# Allegro board VL53L0X.brd
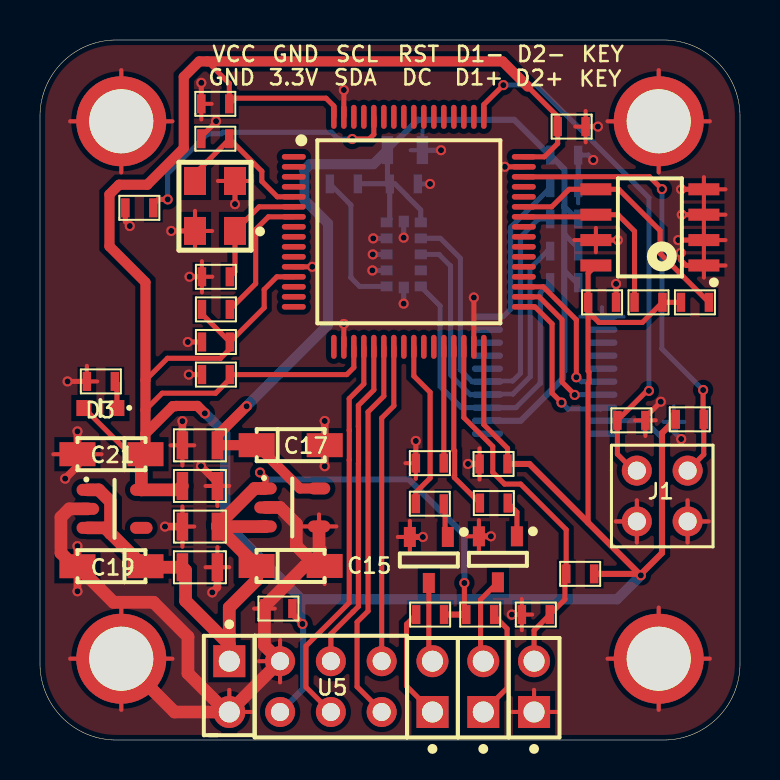
[diagram p0: board, top side]
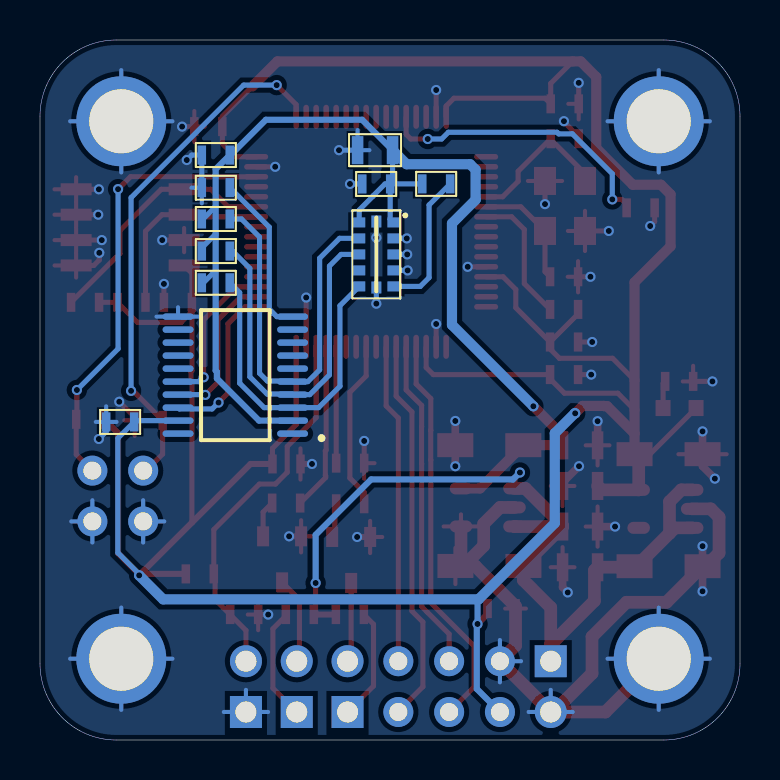
[diagram p1: board, bottom side, seen from below]

Outline 35 x 35 mm; copper layers: TOP, BOTTOM. Coordinates in mm from the lower left corner of the outline.
Outline path: 0,31.19 0,3.81 arc(1.12,1.12) 3.81,0 31.19,0 arc(33.89,1.12) 35,3.81 35,31.19 arc(33.89,33.89) 31.19,35 3.81,35 arc(1.12,33.89) 0,31.19

## Placement (name value [footprint] x y rotation side)
C1  0.1uF  [0603]  8.8 19.9 0 top
C2  0.1uF  [0603]  8.8 18.27 0 top
C3  0.1uF  [0603]  22.68 13.8 0 top
C4  0.1uF  [0603]  8.77 31.81 0 top
C5  0.1uF  [0603]  26.58 30.67 180 top
C6  22pF  [0603]  8.8 23.16 0 top
C7  22pF  [0603]  8.77 30.06 0 top
C8  0.1uF  [0603]  18.19 27.8 180 bottom
C9  4.7uF  [0805]  18.25 29.49 180 bottom
C10  0.1uF  [0603]  28.11 21.88 180 top
C11  0.1uF  [0603]  11.92 6.57 0 top
C12  0.1uF  [0603]  30.99 15.91 180 bottom
C13  0.1uF  [0603]  26.21 29.25 180 bottom
C14  0.1uF  [0603]  24.79 6.27 0 top
C15  10uF  [CAP-3216]  10.83 8.7 0 top
C16  0.1uF  [0805]  8 10.67 0 top
C17  10uF  [CAP-3216]  10.84 14.74 0 top
C18  0.1uF  [0805]  8 14.73 0 top
C19  10uF  [CAP-3216]  5.27 8.69 180 top
C20  0.1uF  [0805]  8 8.64 180 top
C21  10uF  [CAP-3216]  5.27 14.29 180 top
C22  0.1uF  [0805]  8 12.7 180 top
D1  RED  [H-2]  22.16 1.4 90 top
D2  RED  [H-2]  19.62 1.4 90 top
D3  Power  [LED-0603]  3.02 16.6 180 top
J1  Header2*2  [H-2-2]  29.84 13.47 0 top
J2  HEADER2  [H-2]  9.46 3.94 270 top
J3  HEADER2  [H-2]  24.7 1.4 90 top
M1  MTG  [MTG-450-320]  4.06 4.06 0 top
M2  MTG  [MTG-450-320]  30.94 30.94 0 top
M3  MTG  [MTG-450-320]  30.94 4.06 0 top
M4  MTG  [MTG-450-320]  4.06 30.94 0 top
O1  8M  [OSC-3225]  8.75 26.7 180 top
Q1  S9014  [S9014-SOT23]  22.9 9.03 270 top
Q2  S9014  [S9014-SOT23]  19.44 9 270 top
R1  10K  [0603]  19.49 13.84 0 top
R2  10K  [0603]  4.97 26.61 0 top
R3  10K  [0603]  29.57 15.98 0 top
R4  10K  [0603]  32.49 16.04 0 top
R5  10K  [0603]  8.8 21.53 0 top
R6  10K  [0603]  26.21 26.05 0 bottom
R7  10K  [0603]  26.21 24.45 0 bottom
R8  10K  [0603]  26.21 22.86 0 bottom
R9  10K  [0603]  15.19 27.81 0 bottom
R10  0R  [0603]  26.21 27.62 180 bottom
R11  10K  [0603]  30.43 21.88 0 top
R12  10K  [0603]  32.75 21.88 180 top
R13  10K  [0603]  27.01 8.31 0 top
R14  200R  [0603]  19.51 6.27 0 top
R15  200R  [0603]  22.01 6.27 180 top
R16  4.7K  [0603]  22.69 11.85 180 top
R17  4.7K  [0603]  19.49 11.81 180 top
R18  1.5K  [0603]  3.04 17.93 0 top
U1  STM32F103RBT6  [STM32F103_LQFP64]  12.78 29.16 0 top
U2  TXS0108EPWR  [TXS0108EPWR-TSSOP20]  25.24 18.24 0 bottom
U3  -  [VL53L0X]  18.18 24.28 180 bottom
U4  AT24C02  [AT24C02-SOIC]  30.5 25.63 180 top
U5  0.96LCD  [H-3-2]  12 3.94 0 top
U6  TPS78228DDCR  [SOT-25]  12.61 11.63 0 top
U7  XC6219F331  [SOT-25]  3.73 11.56 0 top

## Library data of the parts
C1-C14 C16 C18 C20 C22 = Cap
C15 C17 C19 C21 = Cap+
D1-D3 = LED
J1 = Header2*2
J2 J3 = HEADER 2/SM
M1-M4 = MTG
O1 = OSC-N
Q1 Q2 = S9014
R1-R18 = Res
U1 = STM32F103RBT6
U2 = TXS0108EPWR
U3 = VL53L0X
U4 = AT24C02
U5 = 0.96LCD
U6 = TPS78228DDCR
U7 = XC6219F331

## Footprints (pads in the part's own frame, mm; a bottom-side part is the same pattern mirrored in y, then rotated)
0603
  rect 0.425x0.95 smd: 1(-0.7,0) 2(0.7,0)
0805
  rect 0.575x1.4 smd: 1(-0.875,0) 2(0.875,0)
AT24C02-SOIC
  rect 1.55x0.6 smd: 1(-2.7,1.905) 2(-2.7,0.635) 3(-2.7,-0.635) 4(-2.7,-1.905) 5(2.7,-1.905) 6(2.7,-0.635) 7(2.7,0.635) 8(2.7,1.905)
CAP-3216
  rect 1.8x1.2 smd: 1(0,0) 2(3.4,0)
H-2
  rect 1.6x1.6 hole 1.05: 1(0,0)
  round 1.6 hole 1.05: 2(2.54,0)
H-2-2
  round 1.5 hole 0.9: 1(0,0) 2(2.54,0) 3(0,-2.54) 4(2.54,-2.54)
H-3-2
  round 1.5 hole 0.9: 1(0,0) 2(0,-2.54) 3(2.54,0) 4(2.54,-2.54) 5(5.08,0) 6(5.08,-2.54)
LED-0603
  rect 0.75x0.8 smd: 1(0.825,0) 2(-0.825,0)
MTG-450-320
  round 4.5 hole 3.2: 1(0,0)
OSC-3225
  rect 1.1x1.4 smd: 1(-1,1.25) 2(-1,-1.25) 3(1,-1.25) 4(1,1.25)
S9014-SOT23
  rect 1x0.6 smd: 1(-1.15,0.95) 2(-1.15,-0.95) 3(1.15,0)
SOT-25
  oval 1.125x0.6 smd: 1(-1.338,0.95) 2(-1.338,0) 3(-1.338,-0.95) 4(1.338,-0.95) 5(1.338,0.95)
STM32F103_LQFP64
  oval 1.2x0.28 smd: 1(-0.087,0) 2(-0.087,-0.5) 3(-0.087,-1) 4(-0.087,-1.5) 5(-0.087,-2) 6(-0.087,-2.5) 7(-0.087,-3) 8(-0.087,-3.5) 9(-0.087,-4) 10(-0.087,-4.5) 11(-0.087,-5) 12(-0.087,-5.5) 13(-0.087,-6) 14(-0.087,-6.5) 15(-0.087,-7) 16(-0.087,-7.5) 33(11.412,-7.5) 34(11.412,-7) 35(11.412,-6.5) 36(11.412,-6) 37(11.412,-5.5) 38(11.412,-5) 39(11.412,-4.5) 40(11.412,-4) 41(11.412,-3.5) 42(11.412,-3) 43(11.412,-2.5) 44(11.412,-2) 45(11.412,-1.5) 46(11.412,-1) 47(11.412,-0.5) 48(11.412,0)
  oval 0.28x1.2 smd: 17(1.913,-9.5) 18(2.412,-9.5) 19(2.913,-9.5) 20(3.412,-9.5) 21(3.913,-9.5) 22(4.412,-9.5) 23(4.913,-9.5) 24(5.412,-9.5) 25(5.913,-9.5) 26(6.412,-9.5) 27(6.913,-9.5) 28(7.412,-9.5) 29(7.913,-9.5) 30(8.412,-9.5) 31(8.913,-9.5) 32(9.412,-9.5) 49(9.412,2) 50(8.913,2) 51(8.412,2) 52(7.913,2) 53(7.412,2) 54(6.913,2) 55(6.412,2) 56(5.913,2) 57(5.412,2) 58(4.913,2) 59(4.412,2) 60(3.913,2) 61(3.412,2) 62(2.913,2) 63(2.412,2) 64(1.913,2)
TXS0108EPWR-TSSOP20
  oval 1.55x0.325 smd: 1(-2.863,2.925) 2(-2.863,2.275) 3(-2.863,1.625) 4(-2.863,0.975) 5(-2.863,0.325) 6(-2.863,-0.325) 7(-2.863,-0.975) 8(-2.863,-1.625) 9(-2.863,-2.275) 10(-2.863,-2.925) 11(2.863,-2.925) 12(2.863,-2.275) 13(2.863,-1.625) 14(2.863,-0.975) 15(2.863,-0.325) 16(2.863,0.325) 17(2.863,0.975) 18(2.863,1.625) 19(2.863,2.275) 20(2.863,2.925)
VL53L0X
  rect 0.6x0.5 smd: 1(0.855,1.6) 2(0.855,0.8) 3(0.855,0) 4(0.855,-0.8) 5(0.855,-1.6) 7(-0.855,-1.6) 8(-0.855,-0.8) 9(-0.855,0) 10(-0.855,0.8) 11(-0.855,1.6)
  rect 0.5x0.6 smd: 6(0,-1.655) 12(0,1.645)

## Nets
GND: C1.1 C2.1 C3.1 C4.1 C5.1 C6.1 C7.1 C8.1 C9.1 C10.1 C11.1 C12.1 C13.1 C14.1 C15.2 C16.1 C17.2 C18.1 C19.2 C20.1 C21.2 C22.1 J1.3 J1.4 J2.2 J3.1 M1.1 M2.1 M3.1 M4.1 O1.2(GND1) O1.4(GND2) Q1.2(E) Q2.2(E) R1.1 R2.1 R3.2 R10.1 R18.1 U1.12(VSSA) U1.18(VSS4) U1.31(VSS1) U1.47(VSS2) U1.63(VSS3) U2.11(GND) U3.2(AVSSVCSEL) U3.3(GND1) U3.4(GND2) U3.6(GND3) U3.12(GND4) U4.1(A0) U4.2(A1) U4.3(A2) U4.4(GND) U4.7(WP) U5.1(GND) U6.2(VSS) U6.4(GND) U7.2(VSS)
VCC_5V: C15.1 C16.2 C19.1 C20.2 J2.1 R14.2 R15.2 U6.1(VIN) U6.3(CE) U7.1(VIN) U7.3(CE)
VDD2.8: C8.2 C9.2 C13.2 C17.1 C18.2 R6.2 R7.2 R8.2 R9.2 U2.2(VCCA) U3.1(AVDDVCSEL) U3.11(AVDD) U6.5(VOUT)
VDD3.3: C1.2 C2.2 C3.2 C4.2 C5.2 C10.2 C11.2 C12.2 C21.1 C22.2 D3.1 R4.1 R5.1 R11.2 R12.2 R13.2 U1.13(VDDA) U1.19(VDD4) U1.32(VDD1) U1.48(VDD2) U1.64(VDD3) U2.19(VCCB) U4.8(VCC) U5.2(VCC) U7.5(VOUT)
JTCK: J1.1 R3.1 U1.49(PA14(SDCLK))
JTMS: J1.2 R4.2 U1.46(PA13(SWDIO))
NRST: R5.2 U1.7(NRST)
OSC_IN: C7.2 O1.3(X2) U1.5(OSC_IN)
OSC_OUT: C6.2 O1.1(X1) U1.6(OSC_OUT)
N00130: U1.33(PB12) U2.18(B2)
N00134: U1.34(PB13) U2.17(B3)
N00138: U1.35(PB14) U2.16(B4)
N00228: R16.2 U1.29(PB10)
N00232: R17.2 U1.25(PC5)
N00288: C14.2 J3.2 R13.1 U1.30(PB11)
N00397: R11.1 U1.42(PA9) U4.6(SCL)
N00401: R12.1 U1.43(PA10) U4.5(SDA)
N00686: U1.22(PA6) U5.6(D/C)
N00690: U1.23(PA7) U5.5(RST)
N00694: U1.20(PA4) U5.4(SDA)
N00698: U1.21(PA5) U5.3(SCL)
N015161: D3.2 R18.2
N206718: R1.2 U1.28(PB2(BOOT1))
N206722: R2.2 U1.60(BOOT0)
N212005: R9.1 U3.5(XSHUT)
N212009: R8.1 U2.3(A2) U3.7(GPIO1)
N212016: R7.1 U2.4(A3) U3.9(SDA)
N212023: R6.1 U2.5(A4) U3.10(SCL)
N214668: D1.1 R15.1
N214670: D1.2 Q1.3(C)
N1940739: R10.2 U2.10(OE)
N2134190: Q1.1(B) R16.1
N2142270: Q2.1(B) R17.1
N2142271: D2.2 Q2.3(C)
N2142670: D2.1 R14.1

Pads without a net: U1 1 2 3 4 8 9 10 11 14 15 16 17 24 26 27 36 37 38 39 40 41 44 45 50 51 52 53 54 55 56 57 58 59 61 62; U2 1 6 7 8 9 12 13 14 15 20; U3 8; U7 4

## Via types
v1: diameter 0.508, hole 0.305, TOP to BOTTOM, 61 vias

## Routing (per net, layer and track width the routed paths; a pad name or vN(x,y) marks a point on that pad's centre or on a via; arc(x,y) is an arc through that point)
GND: length 258.9
  TOP w0.203: J3.1 24.7,2.51 ; J3.1 25.81,1.4 ; J3.1 23.6,1.4 ; 26.77,30.67 C5.1 ; C5.1 27.28,29.89 ; C5.1 27.28,31.45 ; O1.4 8.61,25.45 ; O1.4 7.75,24.45 ; O1.4 7.75,26.46 ; C20.1 9.46,8.64 ; C20.1 8.87,9.64 ; C20.1 8.28,8.64 ; 8.58,31.81 C4.1 8.07,31.03 ; 2.86,17.93 R18.1 2.34,18.71 ; C16.1 7.71,10.67 ; C16.1 7.12,9.67 ; C16.1 7.12,11.68 ; C22.1 9.46,12.7 ; C22.1 8.87,11.7 ; C22.1 8.28,12.7 ; U4.2 34.28,25 ; U4.2 33.2,25.6 ; U4.2 33.2,24.39 ; M4.1 6.62,30.94 ; M4.1 4.06,28.38 ; M4.1 4.06,33.49 ; M4.1 1.51,30.94 ; 8.89,27.95 O1.2 10.61,27.95 ; C18.1 7.71,14.73 ; C18.1 6.53,14.73 ; C18.1 7.12,13.73 ; M2.1 33.49,30.94 ; M2.1 30.94,33.49 ; M2.1 28.38,30.94 ; M2.1 30.94,28.38 ; U6.4 13.95,11.28 ; U6.4 13.08,10.68 ; U6.4 14.82,10.68 ; M1.1 4.06,6.62 ; M1.1 6.62,4.06 ; M1.1 4.06,1.51 ; M1.1 1.51,4.06 ; 10.95,3.94 U5.1 ; U5.1 12,2.88 ; U5.1 12,5 ; 33.2,25.66 U4.3 ; U4.3 34.28,26.27 ; U4.3 33.2,26.87 ; 9.46,2.51 J2.2 10.57,1.4 ; 14.23,9.61 C15.2 14.23,7.8 ; 32.38,9.87 J1.4 ; J1.4 32.38,11.98 ; J1.4 33.44,10.93 ; Q1.2 21.95,10.99 ; Q1.2 21.95,9.38 ; Q1.2 21.34,10.18 ; 8.1,22.38 C6.1 ; C6.1 8.1,23.94 ; C6.1 8.61,23.16 ; 21.98,13.02 C3.1 21.98,14.58 ; 26.71,25 U4.7 ; U4.7 27.8,24.39 ; U4.7 27.8,25.6 ; 30.94,1.51 M3.1 ; M3.1 30.94,6.62 ; M3.1 28.38,4.06 ; M3.1 33.49,4.06 ; U4.1 34.28,23.73 ; U4.1 33.2,23.12 ; U4.1 33.2,24.33 ; 29.84,9.87 J1.3 ; J1.3 28.79,10.93 ; J1.3 29.84,11.98 ; C14.1 24.09,7.05 ; C14.1 24.09,5.49 ; C14.1 24.61,6.27 ; 17.89,10.15 Q2.2 ; Q2.2 18.49,9.35 ; Q2.2 18.49,10.96 ; 0.67,14.29 C21.2 3.08,14.29 ; 18.27,13.84 R1.1 18.79,13.06 ; 30.27,15.2 R3.2 ; R3.2 29.75,15.98 ; R3.2 30.79,15.98 ; U4.4 34.28,27.54 ; U4.4 33.2,28.14 ; U4.4 33.2,26.93 ; 11.74,6.57 C11.1 10.7,6.57
  TOP w0.254: U4.4 v1(32.06,27.54) ; v1(31.04,16.91) 30.27,16.15 R3.2 ; C5.1 v1(27.9,30.67) ; O1.4 v1(6.56,25.45) ; U4.7 v1(28.89,25) ; U4.2 v1(31.91,25) ; U1.47 v1(23.24,28.66) ; O1.2 v1(9.75,26.8) ; C6.1 v1(7.48,23.16) ; C10.1 v1(28.81,22.81) ; U1.63 v1(15.19,32.5) ; U4.3 v1(32.09,26.27) ; C14.1 v1(23.59,6.27) ; v1(4.49,25.7) 4.27,25.92 R2.1 ; C1.1 v1(7.39,19.9) ; R1.1 v1(18.79,14.95) ; v1(32.04,24.36) 32.04,24 32.31,23.73 U4.1 ; C7.1 8.07,30.17 8.8,30.91 v1(8.8,30.94) ; C4.1 v1(8.07,32.86) ; U1.18 v1(15.19,20.8) ; U1.31 v1(21.69,22.12) ; C2.1 v1(7.44,18.27) ; R18.1 v1(1.38,17.93) ; U1.12 v1(13.61,23.66)
  TOP w0.305: C3.1 v1(21.4,13.8) ; Q1.2 v1(22.55,10.18) ; Q2.2 v1(19.14,10.15)
  TOP w0.381: C20.1 8.87,7.64 v1(8.61,7.38) ; C16.1 v1(6.25,10.67) ; v1(14.24,15.95) C17.2 v1(14.24,13.69) ; v1(1.87,9.69) C19.2 v1(1.87,7.44) ; v1(8.05,13.69) 8.87,12.87 C22.1 ; v1(1.87,15.43) C21.2 1.87,13.68 v1(1.26,13.07) ; C18.1 v1(7.12,15.94)
  TOP w0.635: 9.33,1.4 6.73,1.4 M1.1 ; 9.33,1.4 7.4,3.33 7.4,5.16 5.68,6.89 3.68,6.89 C19.2 1.71,8.69 1.05,9.35 1.05,11.14 1.46,11.56 U7.2 ; 9.33,1.4 J2.2 U5.1 11.22,4.72 C11.1 11.22,6.68 13.24,8.7 C15.2 13.95,8.98 ; U6.2 12,11.63 12.82,10.81 12.82,9.71 13.54,8.98 13.95,8.98 ; 13.95,8.98 U6.4
  BOTTOM w0.203: 26.91,26.84 R10.1 27.43,27.62 ; J3.1 25.81,1.4 ; J3.1 23.6,1.4 ; J3.1 24.7,2.51 ; 18.53,29.49 C9.1 19.12,30.5 ; M1.1 4.06,6.62 ; M1.1 6.62,4.06 ; M1.1 1.51,4.06 ; M1.1 4.06,1.51 ; 28.79,10.93 J1.3 ; J1.3 29.84,11.98 ; J1.3 29.84,9.87 ; M4.1 6.62,30.94 ; M4.1 1.51,30.94 ; M4.1 4.06,33.49 ; M4.1 4.06,28.38 ; M3.1 30.94,6.62 ; M3.1 33.49,4.06 ; M3.1 30.94,1.51 ; M3.1 28.38,4.06 ; C12.1 32.21,15.91 ; C12.1 31.18,15.91 ; C12.1 31.69,16.69 ; J2.2 9.46,2.51 ; J2.2 10.57,1.4 ; J2.2 8.36,1.4 ; M2.1 33.49,30.94 ; M2.1 28.38,30.94 ; M2.1 30.94,28.38 ; M2.1 30.94,33.49 ; U2.11 28.1,21.64 ; U2.11 27.02,21.17 ; U2.11 29.18,21.17 ; 12,2.88 U5.1 ; U5.1 12,5 ; U5.1 10.95,3.94 ; J1.4 33.44,10.93 ; J1.4 32.38,9.87 ; J1.4 32.38,11.98
  BOTTOM w0.254: v1(18.18,25.12) U3.12 ; v1(32.06,15.05) 31.69,15.42 C12.1 ; R10.1 C13.1 27.41,29.25 v1(27.66,29) ; 18.17,22.62 U3.6 v1(18.18,21.82) ; U3.4 v1(16.62,23.48) ; C8.1 v1(19.5,27.8) ; U3.2 v1(16.66,25.08) ; U3.3 v1(16.64,24.28) ; C9.1 v1(20.05,29.49)
VCC_5V: length 44.6
  TOP w0.254: v1(21.22,7.85) 21.22,6.36
  TOP w0.305: R14.2 R15.2 21.22,6.36 ; U6.1 11.28,13.1 v1(11,13.38)
  TOP w0.635: U6.1 10.73,12.58 8.87,10.72 C16.2 ; U7.1 2.94,12.51 3.53,11.92 3.53,10.34 ; C16.2 10.83,8.71 C15.1 10.83,7.99 9.46,6.63 9.46,4.77 ; C16.2 11.27,10.67 U6.3 ; J2.1 9.46,4.77 ; 9.46,4.77 7.28,6.96 7.28,8.48 C20.2 5.32,8.64 C19.1 5.17,8.69 3.53,10.34 ; U7.3 3.26,10.61 3.53,10.34
  BOTTOM w0.305: v1(21.22,7.85) 21.22,10.26 18.45,13.03 11.35,13.03 v1(11,13.38)
VDD2.8: length 63.8
  TOP w0.508: U6.5 13,12.58 C17.1 8.88,14.74 C18.2 8.87,15.23 v1(10.33,16.69)
  BOTTOM w0.254: 26.22,25.3 26.91,24.61 R7.2 ; 26.22,26.68 26.85,26.05 R6.2 ; 26.22,23.47 26.83,22.86 R8.2 ; 17.49,27.81 C8.2 ; 17.49,27.81 R9.2 ; 17.49,27.81 17.37,27.92 C9.2 ; C8.2 17.75,27.8 18.35,27.21 18.35,27.19 19.04,26.5 U3.11 ; C8.2 17.49,26.04 U3.1
  BOTTOM w0.305: U2.2 24.05,15.97 26.16,18.08 26.16,18.41 26.22,18.47 26.22,28.54 C13.2 25.47,29.25 23.71,31.01 18.89,31.01 C9.2
  BOTTOM w0.508: v1(10.33,16.69) 14.4,20.76 14.4,25.83 13.22,27.01 13.22,28.51 13.5,28.79 16.67,28.79 C9.2
VDD3.3: length 181.8
  TOP w0.254: 8.36,33.93 9.47,32.83 C4.2 9.75,32.09 14.3,32.09 14.69,31.7 U1.64 ; D3.1 4.5,14.29 C21.1 ; C3.2 23.38,14.58 22.19,15.77 U1.32 ; R12.2 R11.2 30.12,20.88 27.95,20.88 27.41,21.42 ; C1.2 8.1,21.3 R5.1 ; C1.2 11.21,21.61 11.21,22.53 11.84,23.16 U1.13 ; C1.2 9.5,19.55 9.03,19.09 9.03,19.09 6.37,19.09 5.27,17.99 ; U1.48 25.22,29.16 25.88,29.83 C5.2 25.88,31.18 24.39,32.67 ; 5.27,16.5 6.11,17.34 8.78,17.34 9.5,18.06 C2.2 15.34,18.27 15.69,18.63 U1.19 ; 27.41,21.42 27.41,18.45 27.45,18.4 27.45,17.87 27.41,17.83 27.41,10.87 ; 27.41,21.42 C10.2 27.41,23.34 U4.8
  TOP w0.305: 29.97,8.31 v1(30.04,8.23) 30.04,8.29 31.1,9.35 31.1,15.35 R4.1 ; 29.97,8.31 R13.2 ; 29.97,8.31 24.47,13.8 C3.2 ; C11.2 12.62,6.3 v1(13.12,5.8)
  TOP w0.508: 5.27,15.32 6.64,16.69 6.79,16.69 6.81,16.7 7.87,16.7 v1(8.24,16.33) ; 5.27,15.32 5.27,22.89 3.47,24.69 3.47,27.28 3.95,27.76 5.36,27.76 7.19,29.59 7.19,33.15 7.97,33.93 23.13,33.93 24.39,32.67 ; 5.27,15.32 C21.1
  TOP w0.635: C22.2 6.93,12.51 U7.5 5.07,14.08 C21.1
  BOTTOM w0.254: v1(30.04,8.23) 30.04,8.3 31.11,9.36 31.11,15.09 C12.2 30.23,15.97 U2.19
  BOTTOM w0.305: U5.2 13.16,2.56 13.16,5.77 v1(13.12,5.8) 13.12,6.98 13.07,7.03
  BOTTOM w0.508: v1(8.24,16.33) 8.26,16.33 9.26,15.34 9.26,10.84 13.07,7.03 28.84,7.03 v1(30.04,8.23)
JTCK: length 26.4
  TOP w0.254: U1.49 22.19,31.77 v1(23.17,32.75) ; v1(30.45,17.46) 30.34,17.46 R3.1 28.87,14.29 29.7,13.47 J1.1
  BOTTOM w0.254: v1(30.45,17.46) 30.45,27.12 24.82,32.75 v1(23.17,32.75)
JTMS: length 22.4
  TOP w0.254: J1.2 33.19,14.28 R4.2 33.16,16.07 v1(33.16,17.5) ; v1(31.1,27.54) 30.47,28.17 26.88,28.17 26.88,28.16 U1.46
  BOTTOM w0.254: v1(33.16,17.5) 31.1,19.56 v1(31.1,27.54)
NRST: length 6.7
  TOP w0.203: 12.66,26.16 U1.7
  TOP w0.254: R5.2 10.78,22.82 10.78,25.53 11.42,26.16 12.66,26.16
OSC_IN: length 7.5
  TOP w0.254: U1.5 11.87,27.16 11.09,27.93 11.09,28.44 C7.2 9.47,30.03 7.75,28.32 O1.3
OSC_OUT: length 5.8
  TOP w0.254: U1.6 10.96,26.66 O1.1 9.75,23.42 C6.2
N00130: length 8.1
  TOP w0.254: v1(26.08,16.87) 26.08,16.87 25.6,17.35 25.6,20.81 24.75,21.66 U1.33
  BOTTOM w0.254: U2.18 28.03,16.55 26.4,16.55 v1(26.08,16.87)
N00134: length 7.8
  TOP w0.254: v1(26.74,17.25) 26.74,17.27 26.1,17.9 26.1,21.01 24.96,22.16 U1.34
  BOTTOM w0.254: v1(26.74,17.25) 26.75,17.27 U2.17
N00138: length 7.6
  TOP w0.254: U1.35 25.17,22.66 26.82,21.01 v1(26.82,18.14)
  BOTTOM w0.254: U2.16 27.07,17.92 26.86,18.14 v1(26.82,18.14)
N00228: length 8.4
  TOP w0.254: U1.29 20.69,14.5 20.73,14.45 20.73,13.23 20.72,13.21 20.72,13.12 R16.2
N00232: length 8.5
  TOP w0.254: U1.25 18.69,18.2 19.51,17.39 19.51,13.1 18.79,12.38 R17.2
N00288: length 19
  TOP w0.254: U1.30 21.19,16.12 22.64,14.68 22.64,13.39 23.23,12.8 24.03,12.8 26.31,10.52 R13.1 26.25,8.24 26.25,7.02 C14.2 24.7,5.48 J3.2
N00397: length 9.5
  TOP w0.254: U1.42 27.69,26.16 U4.6 28.9,26.27 29.73,25.44 R11.1
N00401: length 12.6
  TOP w0.254: U1.43 25.59,26.66 26.46,27.54 U4.5 28.94,27.54 31,25.47 31,24.33 R12.1
N00686: length 19.3
  TOP w0.254: U1.22 17.19,17.2 16.4,16.41 16.4,6.45 15.85,5.9 15.85,2.66 17.08,1.44 U5.6
N00690: length 16
  TOP w0.254: U5.5 17.08,16.1 17.69,16.71 U1.23
N00694: length 20
  TOP w0.254: U1.20 16.19,17.8 15.46,17.07 15.46,15.48 15.47,15.48 15.47,14.01 15.46,14 15.46,6.86 13.3,4.7 13.3,2.64 U5.4
N00698: length 16.6
  TOP w0.254: U5.3 14.54,5.3 15.65,6.41 15.92,6.67 15.92,13.81 15.92,13.82 15.92,15.67 15.92,15.67 15.92,16.73 16.69,17.51 U1.21
N015161: length 1.4
  TOP w0.254: D3.2 3.85,17.83 R18.2
N206718: length 5.8
  TOP w0.254: U1.28 R1.2
N206722: length 14.6
  TOP w0.254: U1.60 16.69,30.28 16.46,30.05 v1(15.61,30.05) ; v1(6.39,27.03) 5.91,27.03 5.67,26.79 R2.2
  BOTTOM w0.254: v1(6.39,27.03) 6.39,28.31 8.38,30.31 9.07,30.31 9.15,30.39 14.58,30.39 14.92,30.05 v1(15.61,30.05)
N212005: length 7.1
  BOTTOM w0.254: R9.1 15.55,26.75 15.55,23.12 15.99,22.68 U3.5
N212009: length 16.6
  BOTTOM w0.254: U3.7 20,21.72 20,17.69 21.07,16.62 U2.3 23.79,16.62 25.02,17.84 25.02,22.37 R8.1
N212016: length 18.7
  BOTTOM w0.254: U3.9 19.95,24.28 20.53,23.7 20.53,18.25 21.51,17.27 U2.4 22.4,17.3 23.65,17.3 24.51,18.16 24.51,23.58 25.37,24.45 R7.1
N212023: length 20.1
  BOTTOM w0.254: R6.1 24.93,26.05 24.02,25.15 24.02,18.34 23.64,17.95 22.4,17.95 U2.5 21.61,17.92 21.02,18.51 21.02,24.09 20.02,25.09 19.04,25.09 U3.10
N214668: length 5.6
  TOP w0.254: R15.1 22.71,6.2 23.36,5.56 23.36,2.59 D1.1
N214670: length 4.4
  TOP w0.254: D1.2 22.03,4.07 22.03,7.02 Q1.3
N1940739: length 8.2
  BOTTOM w0.254: U2.10 23.16,21.17 23.54,21.55 23.54,25.64 R10.2
N2134190: length 1.8
  TOP w0.254: Q1.1 23.85,11.39 R16.1
N2142270: length 1.7
  TOP w0.254: R17.1 20.26,11.75 20.26,10.29 Q2.1
N2142271: length 4
  TOP w0.254: Q2.3 19.44,4.12 D2.2
N2142670: length 5.6
  TOP w0.254: D2.1 18.33,2.7 18.33,5.79 R14.1

## Copper pours and planes (outline as drawn; the poured copper is in the pictures)
GND on TOP: 3.81,0.25 1.3,1.3 0.25,3.81 0.25,31.19 1.3,33.71 3.81,34.75 31.19,34.75 33.71,33.71 34.75,31.19 34.75,3.81 33.71,1.3 31.19,0.25 ; 10 cut-outs
GND on BOTTOM: 3.81,0.25 1.3,1.3 0.25,3.81 0.25,31.19 1.3,33.71 3.81,34.75 31.19,34.75 33.71,33.71 34.75,31.19 34.75,3.81 33.71,1.3 31.19,0.25 ; 4 cut-outs

## Text on the board
Ref Des/Silkscreen Top: GND | VCC | 3.3V | SDA | SCL | DC | RST | D1+ | D1- | D2+ | D2- | KEY
DEVICE_TYPE_BOTTOM: FIGURE | SIZE | 12.0 | 35.43 | 41.34 | 125.98 | DRILL CHART: TOP to BOTTOM | ALL UNITS ARE IN MILS | PLATED | QTY | 61 | 10 | 8 | 4
